# Altium PCB PCB1.PcbDoc
Units mm, origin at the board's own origin, x right, y up, seen from the top; angles counter-clockwise.
Board outline 100 x 100.5 mm, 2 copper layers (Top Layer, Bottom Layer), stack 1.58 mm thick; 55 components, 33 nets, 141 pads, 448 vias.
Unrouted connection lines stored in the file: 1.
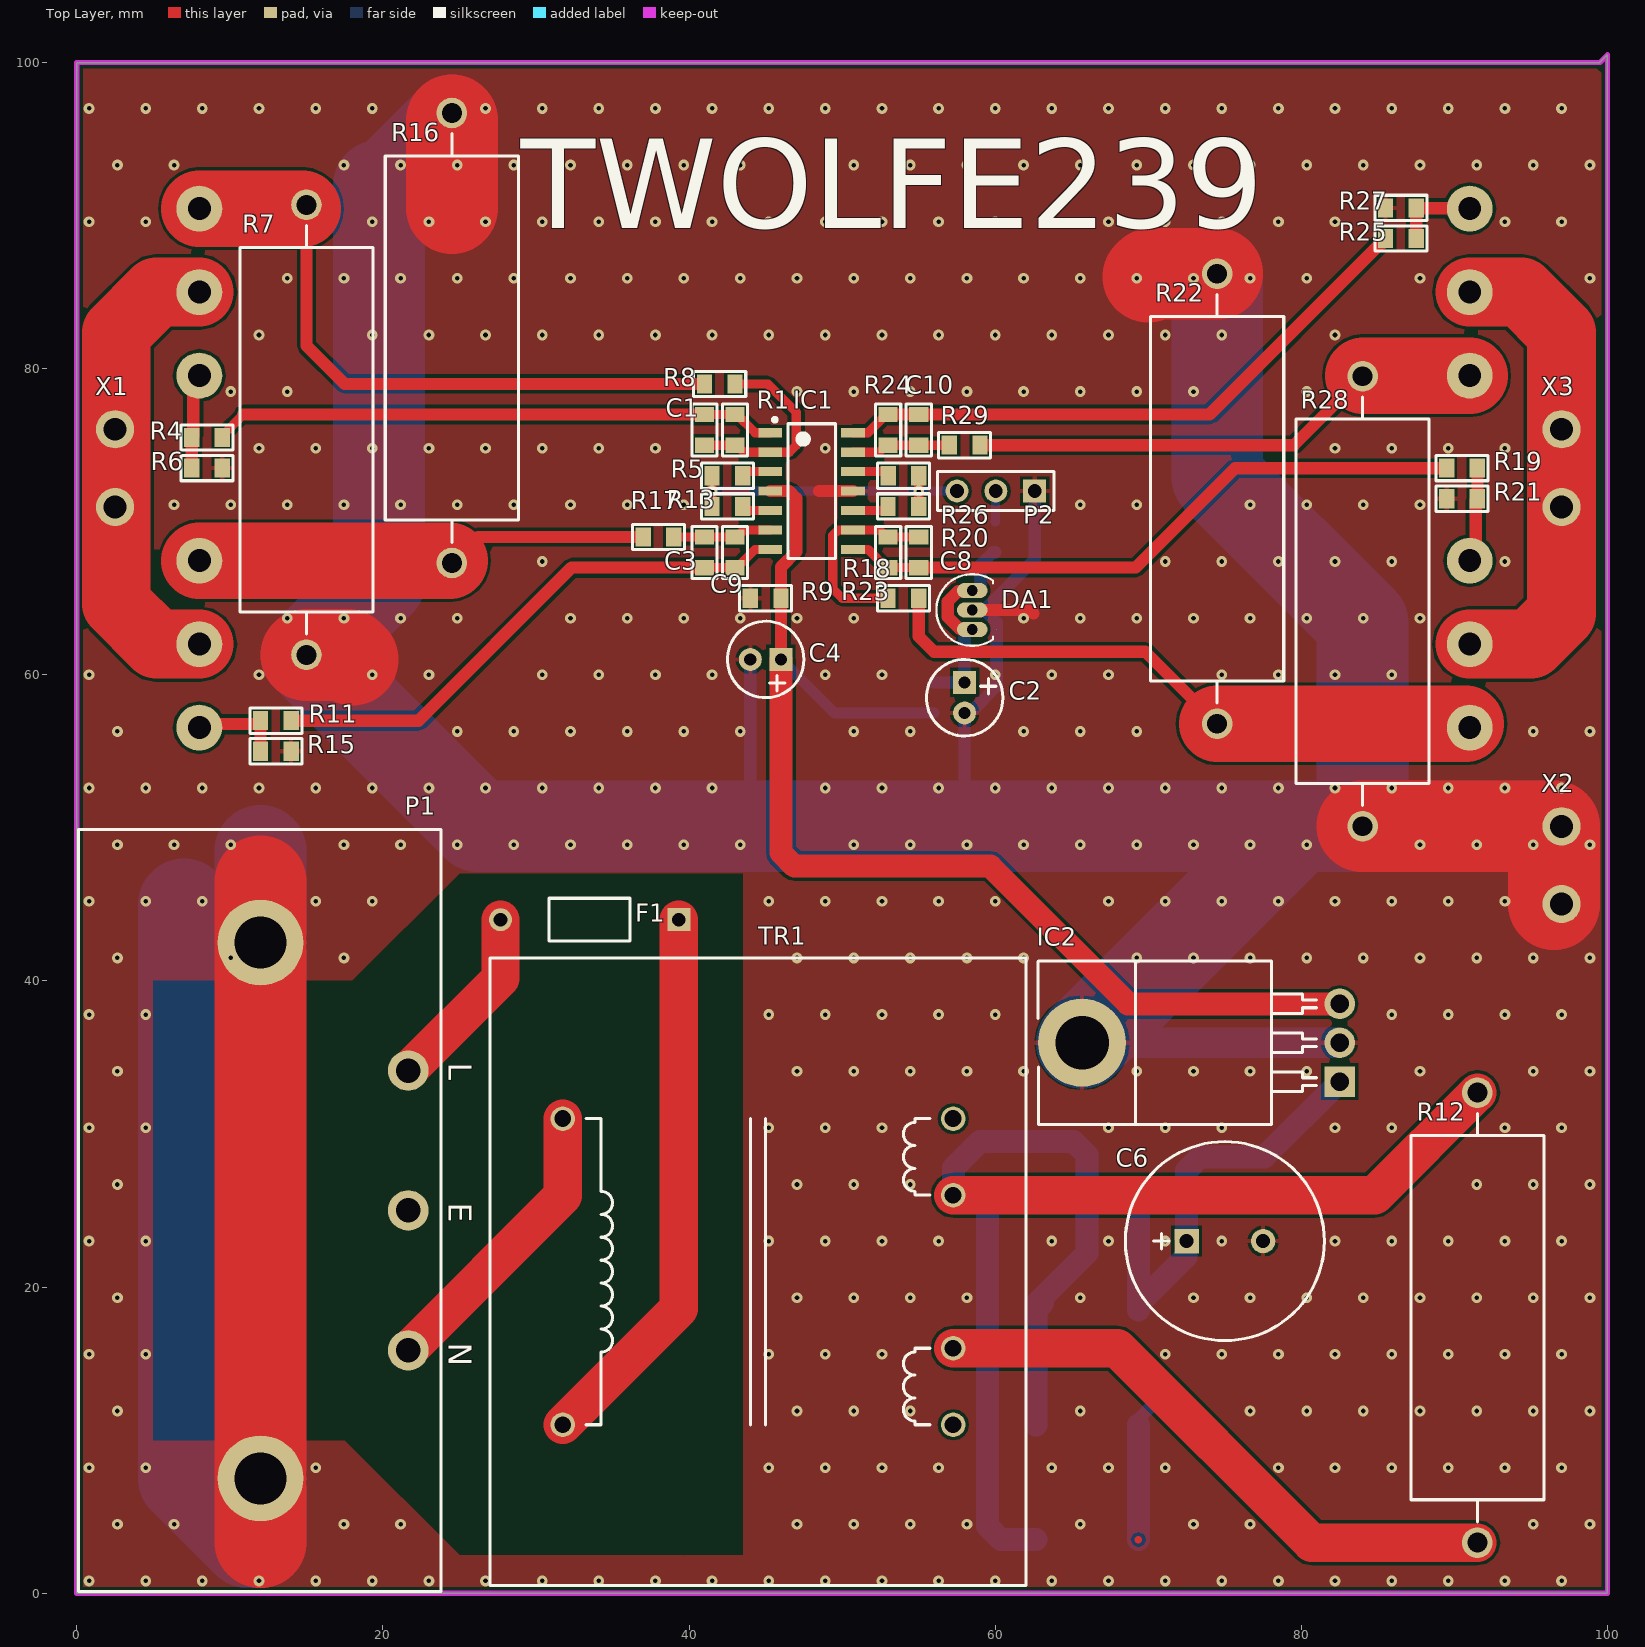
[diagram p0: Top Layer view]
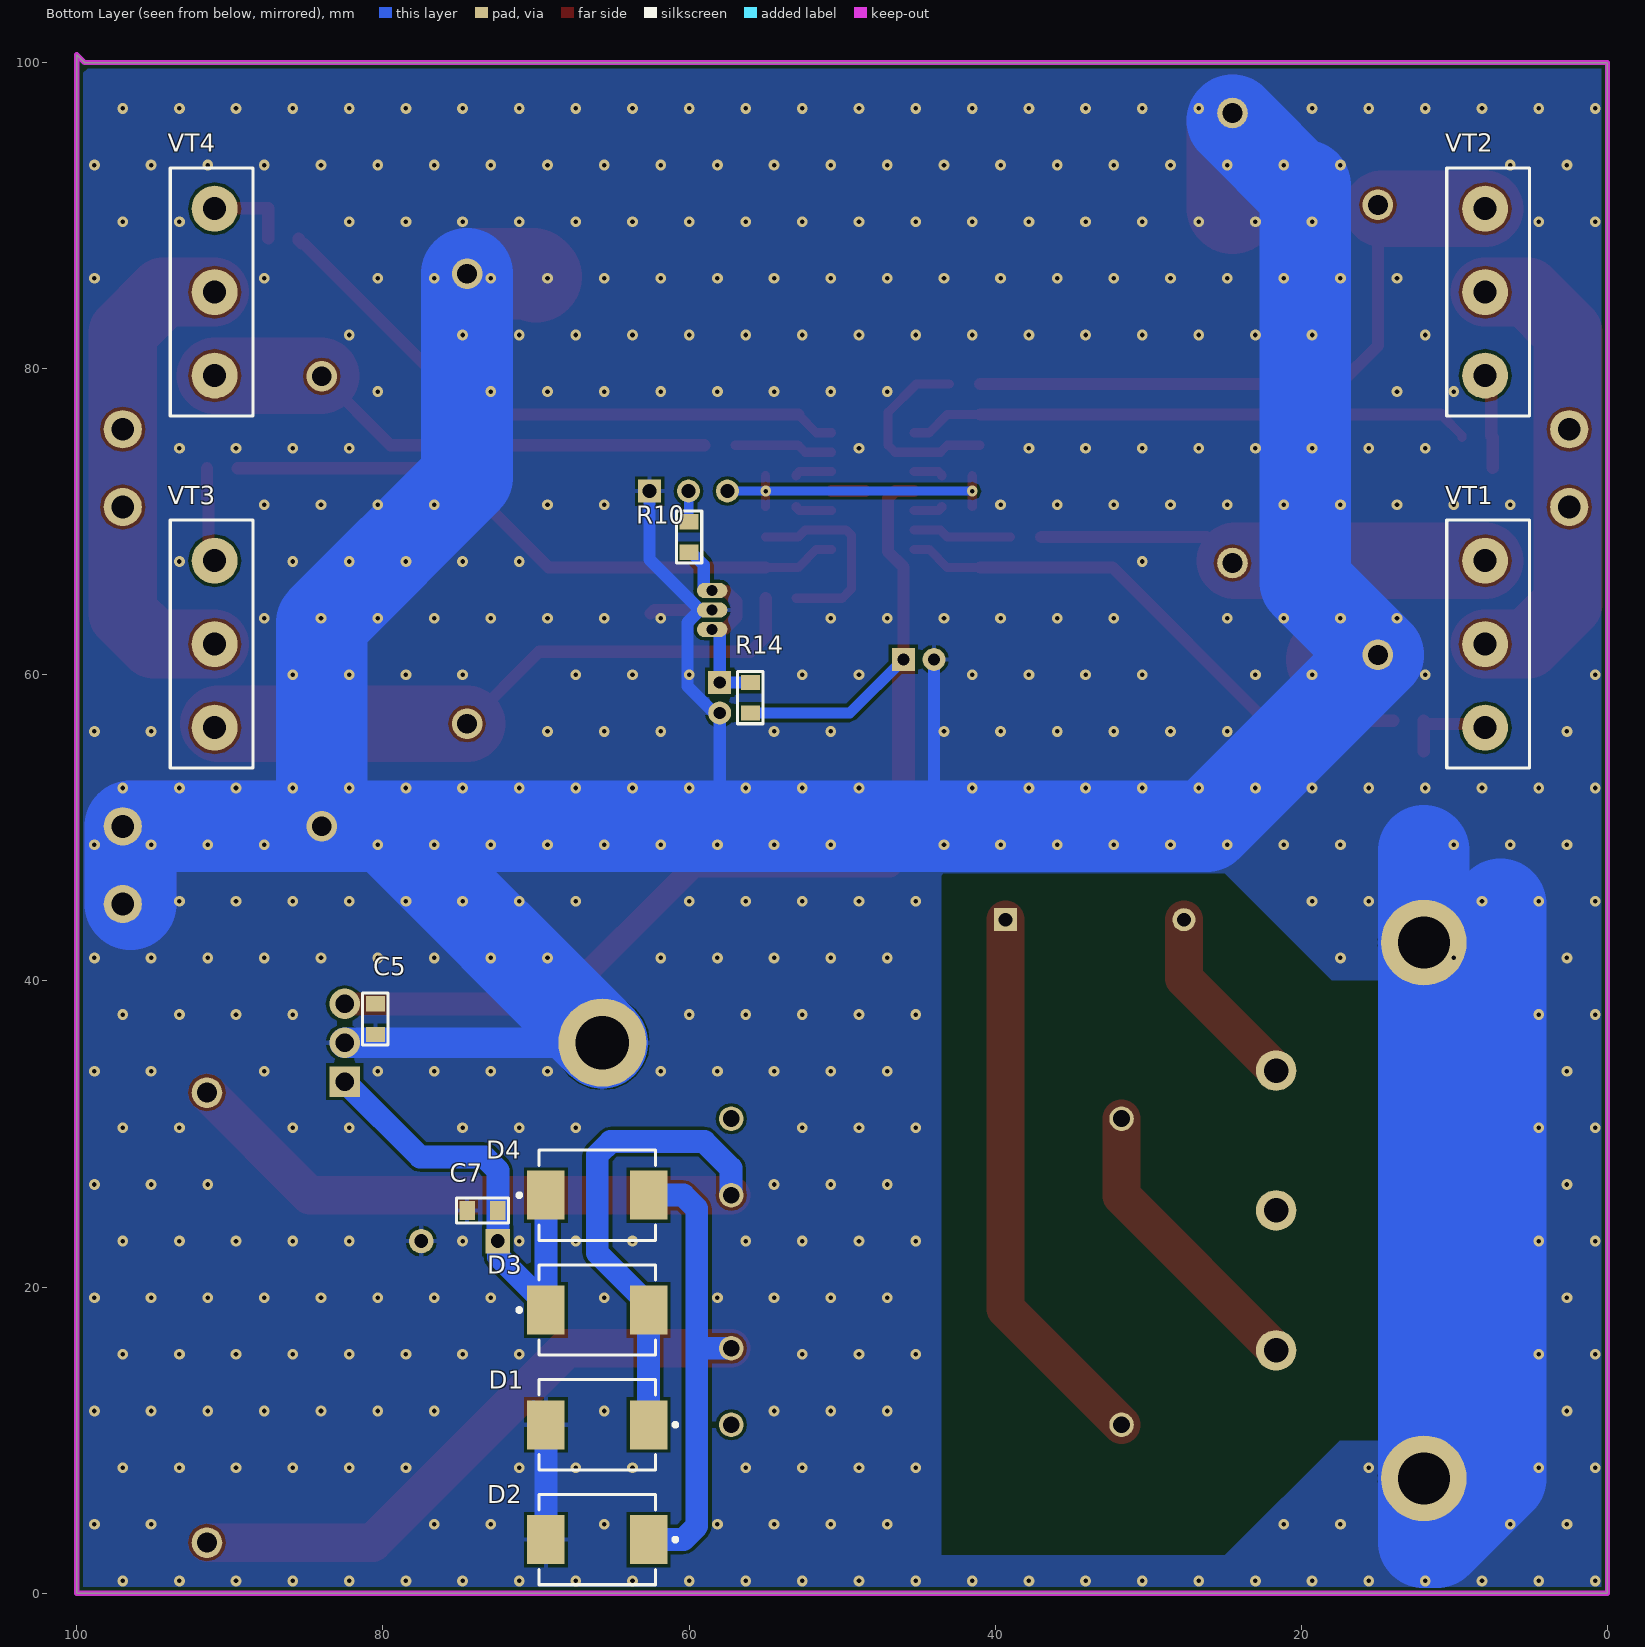
[diagram p1: Bottom Layer view, seen from below]
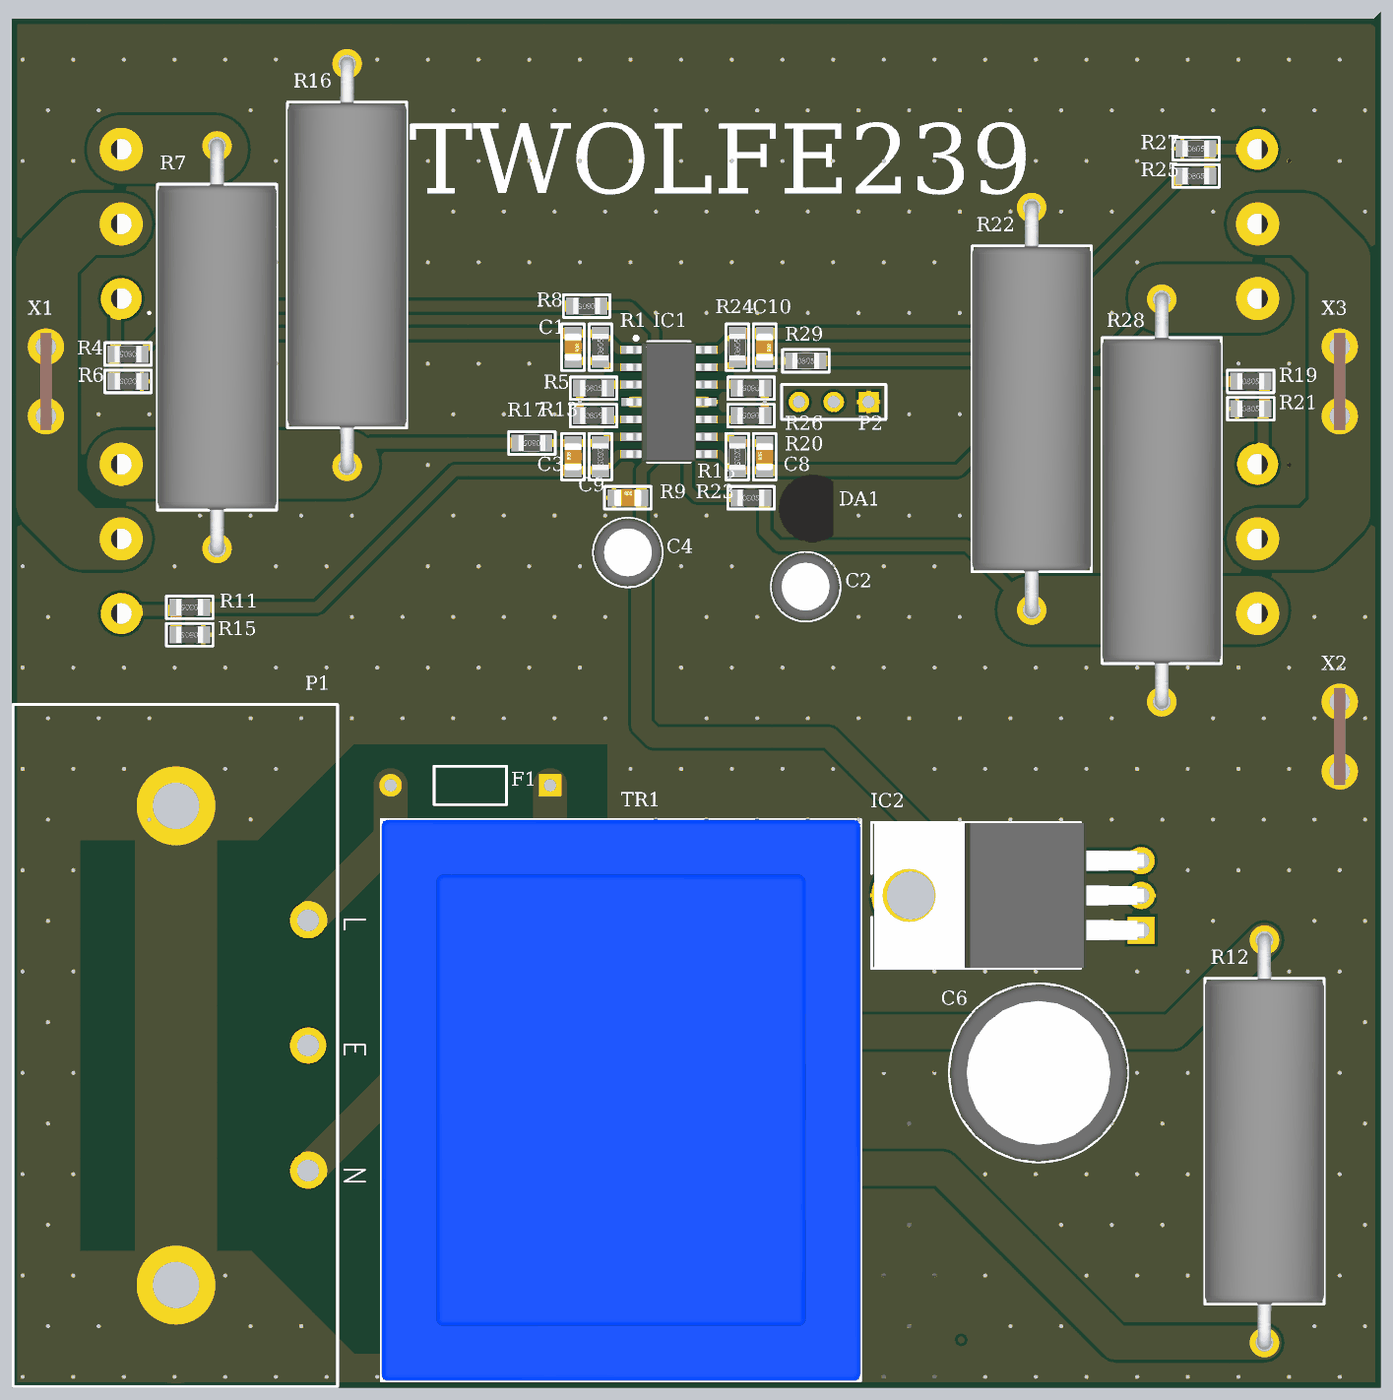
[diagram p2: 3D render of the assembled board from above, using the file's embedded part models]
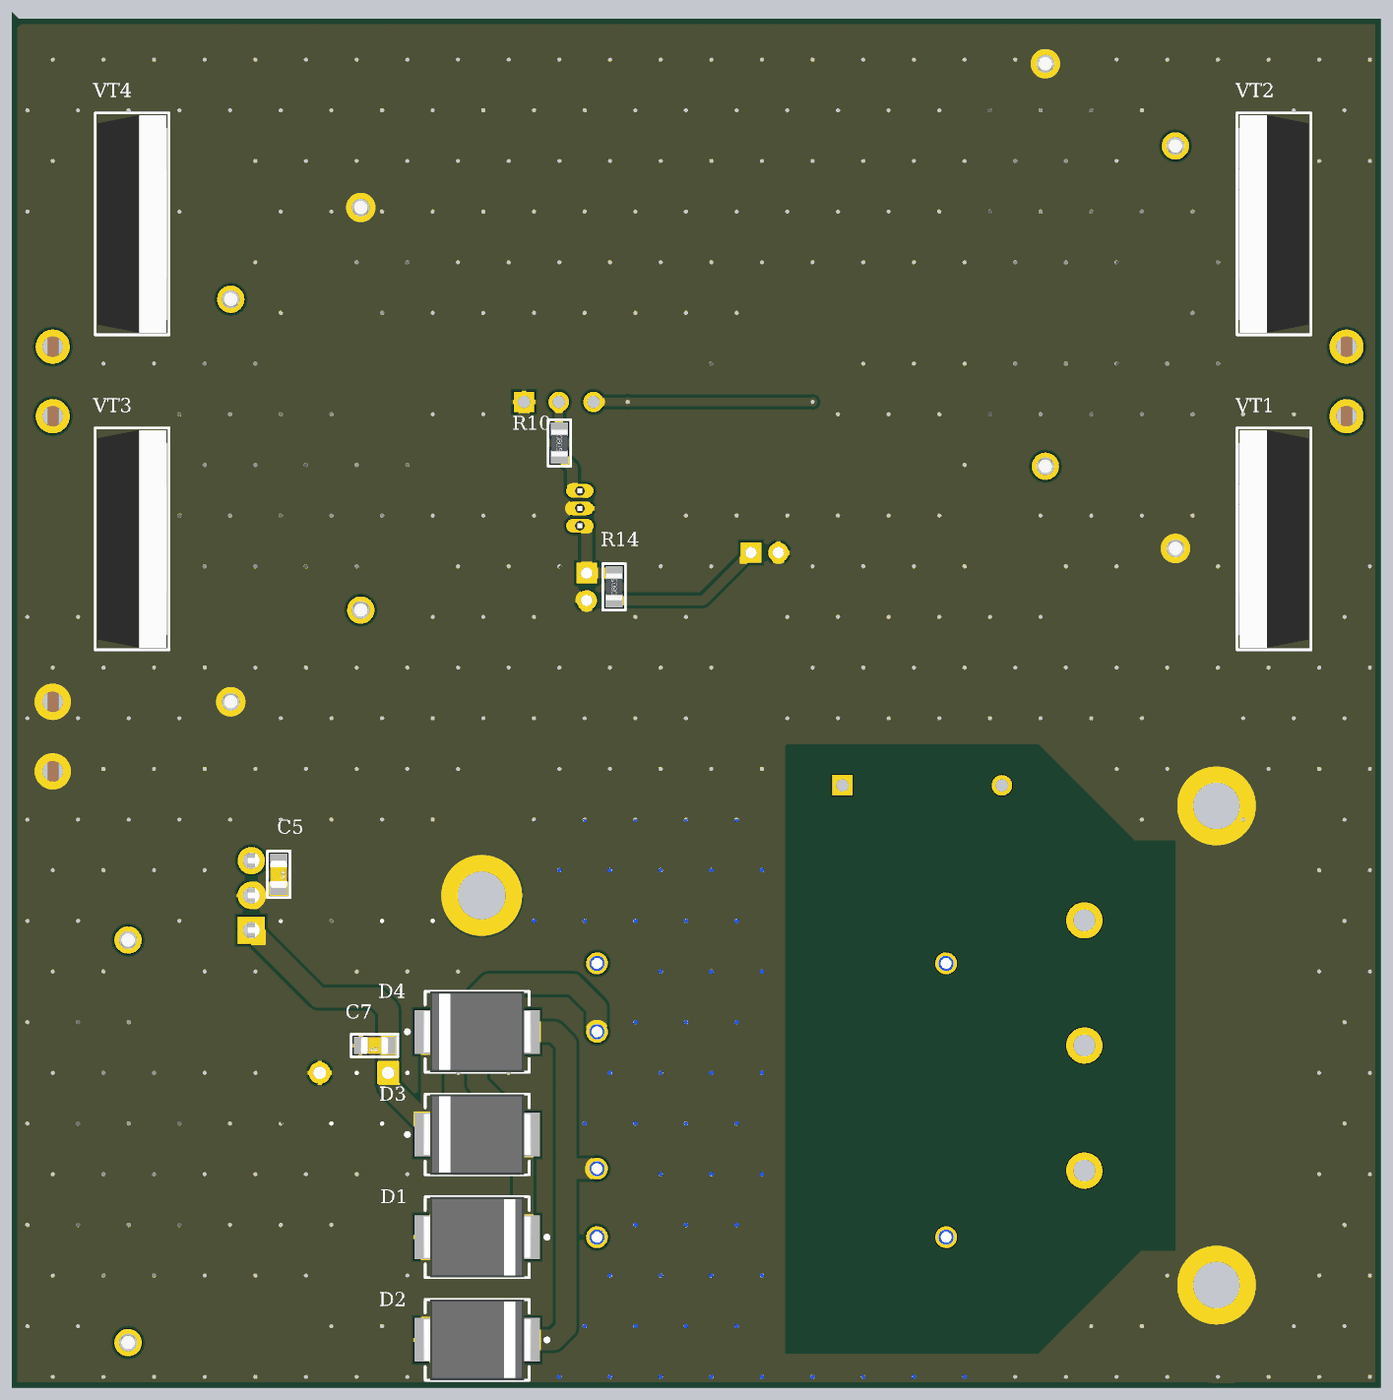
[diagram p3: 3D render of the assembled board from below, using the file's embedded part models]

## Layer stack, top to bottom
Top Solder: solder mask 0.0102, Solder Resist, Dk 3.5
Top Layer: signal copper 0.0356
Dielectric 1: dielectric 1.509, FR-4, Dk 4.8
Bottom Layer: signal copper 0.0356
Bottom Solder: solder mask 0.0102, Solder Resist, Dk 3.5

## Board outline
0,0 0,100 99.5,100 100,100.5 100,0

## Design rules (kind name [scope] priority, off if disabled: settings)
BoardOutlineClearance [All] p1: gap=0.3 ignorepadtopadclearanceinfootprint=FALSE
Clearance Clearance_MultiLayerPad [OnLayer('Multi-Layer') and IsPad] p1: gap=0.2 ignorepadtopadclearanceinfootprint=FALSE except(0: Arc-Hole Track-Hole SMDPad-Hole THPad-Hole Via-Hole Fill-Hole Poly-Hole Region-Hole Text-Hole)
Clearance Clearance_Polygon [InPolygon] p2: gap=0.15 ignorepadtopadclearanceinfootprint=FALSE except(0: Arc-Hole Track-Hole SMDPad-Hole THPad-Hole Via-Hole Fill-Hole Poly-Hole Region-Hole Text-Hole; 0.2: Arc-Poly Arc-Region Track-Poly Track-Region SMDPad-Poly SMDPad-Region THPad-Poly THPad-Region Via-Poly Via-Region Fill-Poly Fill-Region Poly-Poly Poly-Region)
Clearance [All] p3: gap=0.15 ignorepadtopadclearanceinfootprint=FALSE except(0: Arc-Hole Track-Hole SMDPad-Hole THPad-Hole Via-Hole Fill-Hole Poly-Hole Region-Hole Text-Hole)
ComponentClearance [All] p1: gap=0.5 collisioncheckmode=3 verticalgap=0.5 showdistances=FALSE
DiffPairsRouting [All] p1: maxlimit=0.4 minlimit=0.15 mostfreqgap=0.3 toplayer_minwidth=0.15 toplayer_maxwidth=0.3 toplayer_prefwidth=0.15 bottomlayer_minwidth=0.15 bottomlayer_maxwidth=0.3 bottomlayer_prefwidth=0.15 maxuncoupledlength=12.7
Height [All] p1: minheight=0 maxheight=50 prefheight=12.7
HoleSize [All] p1: absolutevalues=TRUE maxlimit=10 minlimit=0.3 maxpercent=80.000 minpercent=20.000
HoleToHoleClearance [All] p1: gap=0.3 allowstackedmicrovias=TRUE
MinimumSolderMaskSliver [All] p1: minsoldermaskwidth=0.2
PlaneClearance [All] p1: clearance=0.5
PlaneConnect [All] p1: planeconnectstyle=Relief reliefexpansion=0.5 reliefentries=4 reliefconductorwidth=0.3 reliefairgap=0.2
PolygonConnect PolygonConnect_PadGND [InNet('GND') and IsPad] p1: connectstyle=Relief reliefconductorwidth=0.3 reliefentries=4 polygonreliefangle="90 Angle" airgapwidth=0.2
PolygonConnect PolygonConnect_Via [IsVia] p2: connectstyle=Direct reliefconductorwidth=0.254 reliefentries=4 polygonreliefangle="90 Angle" airgapwidth=0.254
PolygonConnect [All] p3: connectstyle=Relief reliefconductorwidth=0.3 reliefentries=4 polygonreliefangle="90 Angle" airgapwidth=0.2
RoutingVias [All] p1: holewidth=0.3 width=0.7 viastyle="Through Hole" minholewidth=0.3 minwidth=0.6 maxholewidth=0.5 maxwidth=1.2
SilkToSolderMaskClearance [IsPad] p1: minsilkscreentomaskgap=0.2 clearancetoexposedcopper=TRUE
SolderMaskExpansion [All] p1: expansion=0.075 istentingtop=FALSE
Width [All] p1: maxlimit=10 minlimit=0.15 preferedwidth=0.15
21 further rules are at their usual default settings.

## Components (designator, comment, footprint, x,y, rotation, side; value= is the part's Value field where it differs from the comment)
C1 "Ceramic capacitor, 1nF, X7R, ±10%, 16V, 805, -55...+125°C" "CAP: 0805" 41,76 r270 top value=1nF
C2 "10uF" CAPPR200-500X1100 58,58.5 r270 top
C3 "Ceramic capacitor, 1nF, X7R, ±10%, 16V, 805, -55...+125°C" "CAP: 0805" 41,68 r90 top value=1nF
C4 "10uF" CAPPR200-500X1100 45,61 r180 top
C5 "Ceramic capacitor, 0.1uF, X7R, ±10%, 16V, 805, -55...+125°C" "CAP: 0805" 80.5,37.5 r270 bottom value=0.1uF
C6 "1000uF" CAPPR500-1300X2700 75,23 r0 top
C7 "Ceramic capacitor, 0.1uF, X7R, ±10%, 16V, 805, -55...+125°C" "CAP: 0805" 73.5,25 r0 bottom value=0.1uF
C8 "Ceramic capacitor, 1nF, X7R, ±10%, 16V, 805, -55...+125°C" "CAP: 0805" 55,68 r90 top value=1nF
C9 "Ceramic capacitor, 0.1uF, X7R, ±10%, 16V, 805, -55...+125°C" "CAP: 0805" 45,65 r0 top value=0.1uF
C10 "Ceramic capacitor, 1nF, X7R, ±10%, 16V, 805, -55...+125°C" "CAP: 0805" 55,76 r270 top value=1nF
D1 "SS34" DIOM7659X265N 66,11 r0 bottom
D2 "SS34" DIOM7659X265N 66,3.5 r0 bottom
D3 "SS34" DIOM7659X265N 66,18.5 r180 bottom
D4 "SS34" DIOM7659X265N 66,26 r180 bottom
DA1 "TL431" TO-92 58.5,64.23 r0 top
F1 "" PIN-W2/E2.8 33.5,44 r180 top
IC1 "LM324M" SOIC127P600X175-14N 48,72 r0 top
IC2 "LM7812CT" TO-220-H 82.5,35.96 r90 top
P1 "Plug AC Male" IEC9.14-2H3 3.3,25 r180 top
P2 "Header 3" HDR1X3 62.58,72 r180 top
R1 "Resistor film, 220K, ±5%, 805, 0.125W, -55...+125°C" "RES: 0805" 43,76 r90 top value=220K
R4 "Resistor film, 1K, ±5%, 805, 0.125W, -55...+125°C" "RES: 0805" 8.5,75.5 r180 top value=1K
R5 "Resistor film, 1K, ±5%, 805, 0.125W, -55...+125°C" "RES: 0805" 42.5,73 r0 top value=1K
R6 "Resistor film, 4K7, ±5%, 805, 0.125W, -55...+125°C" "RES: 0805" 8.501,73.5 r180 top value=4K7
R7 "0R22" RES_OHMITE_45 15,76 r90 top
R8 "Resistor film, 1K, ±5%, 805, 0.125W, -55...+125°C" "RES: 0805" 42,79 r180 top value=1K
R9 "Resistor film, 220K, ±5%, 805, 0.125W, -55...+125°C" "RES: 0805" 43,68 r270 top value=220K
R10 "Resistor film, 22K, ±5%, 805, 0.125W, -55...+125°C" "RES: 0805" 60,69 r270 bottom value=22K
R11 "Resistor film, 1K, ±5%, 805, 0.125W, -55...+125°C" "RES: 0805" 13,57 r180 top value=1K
R12 "100R" RES_OHMITE_45 91.5,18 r90 top
R13 "Resistor film, 1K, ±5%, 805, 0.125W, -55...+125°C" "RES: 0805" 42.5,71 r0 top value=1K
R14 "Resistor film, 10K, ±5%, 805, 0.125W, -55...+125°C" "RES: 0805" 56,58.5 r90 bottom value=10K
R15 "Resistor film, 4K7, ±5%, 805, 0.125W, -55...+125°C" "RES: 0805" 13,55 r180 top value=4K7
R16 "0R22" RES_OHMITE_45 24.5,82 r270 top
R17 "Resistor film, 1K, ±5%, 805, 0.125W, -55...+125°C" "RES: 0805" 38,69 r180 top value=1K
R18 "Resistor film, 220K, ±5%, 805, 0.125W, -55...+125°C" "RES: 0805" 53,68 r270 top value=220K
R19 "Resistor film, 1K, ±5%, 805, 0.125W, -55...+125°C" "RES: 0805" 90.499,73.5 r0 top value=1K
R20 "Resistor film, 1K, ±5%, 805, 0.125W, -55...+125°C" "RES: 0805" 54,71 r180 top value=1K
R21 "Resistor film, 4K7, ±5%, 805, 0.125W, -55...+125°C" "RES: 0805" 90.5,71.5 r0 top value=4K7
R22 "0R22" RES_OHMITE_45 74.5,71.5 r270 top
R23 "Resistor film, 1K, ±5%, 805, 0.125W, -55...+125°C" "RES: 0805" 54,65 r0 top value=1K
R24 "Resistor film, 220K, ±5%, 805, 0.125W, -55...+125°C" "RES: 0805" 53,76 r90 top value=220K
R25 "Resistor film, 1K, ±5%, 805, 0.125W, -55...+125°C" "RES: 0805" 86.5,88.5 r0 top value=1K
R26 "Resistor film, 1K, ±5%, 805, 0.125W, -55...+125°C" "RES: 0805" 54,72.999 r180 top value=1K
R27 "Resistor film, 4K7, ±5%, 805, 0.125W, -55...+125°C" "RES: 0805" 86.5,90.5 r0 top value=4K7
R28 "0R22" RES_OHMITE_45 84,64.8 r90 top
R29 "Resistor film, 1K, ±5%, 805, 0.125W, -55...+125°C" "RES: 0805" 58,75 r0 top value=1K
TR1 "230V to 1x 15V" XFMR_CLAIRTRONIC_14102 44.5,21 r0 top
VT1 "MOSFET N-channel transistor, 80V, 7A, 9.1nC, 2.5W, 34mOhm, 756pF, 8-TDSON, -55...+150°C" TO247 8,62 r90 bottom
VT2 "MOSFET N-channel transistor, 80V, 7A, 9.1nC, 2.5W, 34mOhm, 756pF, 8-TDSON, -55...+150°C" TO247 8,85 r90 bottom
VT3 "MOSFET N-channel transistor, 80V, 7A, 9.1nC, 2.5W, 34mOhm, 756pF, 8-TDSON, -55...+150°C" TO247 91,62 r270 bottom
VT4 "MOSFET N-channel transistor, 80V, 7A, 9.1nC, 2.5W, 34mOhm, 756pF, 8-TDSON, -55...+150°C" TO247 91,85 r270 bottom
X1 "62650-1" 62650-1 2.5,73.5 r90 top
X2 "62650-1" 62650-1 97,47.56 r90 top
X3 "62650-1" 62650-1 97,73.5 r90 top

## Footprints (in the part's own frame and the unit in brackets; to place one, negate y for a bottom-side part, rotate by r counter-clockwise, add the part's x,y. Pads: shape width x height; smd on the part's side, far side on the other; paste and mask are expansions set on the pad)
62650-1 [mm]
  round 2.5 hole 1.5: 1(-2.54,0) 1(2.54,0)
  body extent -3.55,-0.42 3.56,0.42, height 9.19
"CAP: 0805" [mm]
  rect 1x1.25 smd: 1(-1,0) 2(1,0)
  silkscreen extent -1.7,-0.82 1.7,0.82, body extent -1,-0.62 1,0.63, height 0.78
CAPPR200-500X1100 [mm] "Capacitor, Radial, Pin spacing 2.0mm - Body Diameter 5.0mm X Body Height 11mm"
  rect 1.5x1.5 hole 0.8: 1(-1,0)
  round 1.5 hole 0.8: 2(1,0)
  silkscreen extent -2.5,-2.5 2.5,2.5, body extent -2.51,-2.51 2.49,2.49, height 10.9
CAPPR500-1300X2700 [mm] "Capacitor, Radial, Pin spacing 5.0mm - Body Diameter 13.0mm X Body Height 27.0mm"
  rect 1.6x1.6 hole 0.9: 1(-2.5,0)
  round 1.6 hole 0.9: 2(2.5,0)
  silkscreen extent -6.5,-6.5 6.5,6.5, body extent -6.5,-6.48 6.5,6.48, height 27
DIOM7659X265N [mm] "DO-214-AB/SMC Molded Diode, Body 7.95x5.9mm, IPC Medium Density"
  rect 2.45x3.2 smd: 1(-3.35,0) 2(3.35,0)
  silkscreen extent -5.22,-2.95 3.8,2.95, body extent -3.97,-2.95 3.98,2.95, height 2.65
HDR1X3 [mm] "Connector; Header; 3 Position"
  rect 1.5x1.5 hole 0.9: 1(0,0)
  round 1.5 hole 0.9: 2(2.54,0) 3(5.08,0)
  silkscreen extent -1.27,-1.27 6.35,1.27
IEC9.14-2H3 [mm] "Mains Power Inlet, IEC60 320-1 C14, PC Flange Rear Mount"
  round 2.65 hole 1.6: 1(-18.35,-9.14) 2(-18.35,9.14) 3(-18.35,0)
  round 5.6 hole 3.4: MH1(-8.7,17.5) MH2(-8.7,-17.5)
  silkscreen extent -20.5,-24.9 3.2,24.9
PIN-W2/E2.8 [mm] "Thru-Hole; 2 Leads"
  rect 1.5x1.5 hole 0.9: 1(-5.825,0)
  round 1.5 hole 0.9: 2(5.825,0)
  silkscreen extent -2.65,-1.4 2.65,1.4
"RES: 0805" [mm]
  rect 1x1.25 smd: 1(-1,0) 2(1,0)
  silkscreen extent -1.7,-0.82 1.7,0.82, body extent -1,-0.6 1,0.6, height 0.44
RES_OHMITE_45 [mm] "Resistor, Axial, Pad Spacing 29.4mm - Body Lengh 23.8mm X Body Diameter 8.7mm"
  round 2 hole 1.3: 1(-14.7,0) 2(14.7,0)
  silkscreen extent -13.35,-4.35 13.35,4.35, body extent -15.2,-4.35 15.2,4.35, height 8.7
SOIC127P600X175-14N [mm] "SOIC 14, Pitch 1.27mm - Body 4x8.75mm, IPC Medium Density"
  rect 1.55x0.6 smd: 1(-2.7,3.81) 2(-2.7,2.54) 3(-2.7,1.27) 4(-2.7,0) 5(-2.7,-1.27) 6(-2.7,-2.54) 7(-2.7,-3.81) 8(2.7,-3.81) 9(2.7,-2.54) 10(2.7,-1.27) 11(2.7,0) 12(2.7,1.27) 13(2.7,2.54) 14(2.7,3.81)
  silkscreen extent -2.52,-4.4 1.55,4.78, body extent -3.1,-4.37 3.1,4.38, height 1.75
TO247 [mm] "3-Lead Plastic TO-247"
  round 3 hole 1.5: 1(-5.45,0) 2(0,0) 3(5.45,0)
  round 0.5 on Mech2: ""(-7.4,-2.3)
  silkscreen extent -8.1,-2.9 8.1,2.5, body extent -7.95,-2.75 7.95,2.35, height 26.95
TO-92 [mm] "TO, Flat Index; 3 In-Line, Axial Leads; Body Dia. 4.6mm; Leads 0.41 x 0.39 mm (max)"
  oval 2x1 hole 0.7: 1(0,-1.27) 2(0,0) 3(0,1.27)
  silkscreen extent -2.34,-2.34 1.35,2.34, body extent -2.5,-2.5 1.5,2.5, height 7
TO-220-H [mm] "TO-220 3-Terminal + Tab - Horizontal Mount"
  rect 2x2 hole 1.2: 1(-2.54,0)
  round 2 hole 1.2: 2(0,0) 3(2.54,0)
  round 5.75 hole 3.5: 4(0,16.828)
  silkscreen extent -5.33,1.5 5.33,19.7, body extent -5.27,-0.28 5.27,19.49, height 4.7
XFMR_CLAIRTRONIC_14102 [mm] "CLAIRTRONIC 14102 Encapsulated Transformer 3.5VA - Body 41X35mm"
  round 1.6 hole 1.1: 1(-12.75,10) 2(-12.75,-10) 3(12.75,10) 4(12.75,5) 5(12.75,-5) 6(12.75,-10)
  silkscreen extent -17.5,-20.5 17.5,20.5, body extent -17.5,-20.5 17.5,20.5, height 28

## Part data
C1 C3 C5 C7 C8 C9 C10: library part Ceramic_0805, Manufacturer=Yageo, Package=0805, PartNumber=CC0805KRX7R7BB104, Temperature=-55...+125°C, Tolerance=±10%, TypeCapacitor="Ceramic capacitor", TypeDielectric=X7R, Voltage=16V, HelpURL=https://www.digikey.com/product-detail/en/yageo/CC0805KRX7R7BB104/311-1142-1-ND/303052
  C1 C3 C8 C10: ValueManufacturerPartNumber="Ceramic capacitor, 1nF, X7R, ±10%, 16V, 805, -55...+125°C"
  C5 C7 C9: ValueManufacturerPartNumber="Ceramic capacitor, 0.1uF, X7R, ±10%, 16V, 805, -55...+125°C"
C2 C4: library part CAER_10UF_63V_20%_PANASONIC_ECA1JM100, "Polarised capacitor", Case="LS2 D5 x H11", Manufacturer=PANASONIC, Manufacturer Part Number=ECA1JM100, Tolerance=±20%, Voltage=63V, Author="CERN DEM JLC", Component Type=Standard, ComponentHeight=11mm, CreateDate=04.03.2009, HelpURL=\\cern.ch\dfs\Applications\Altium\Datasheets\CAER_PANASONIC_M.pdf, LatestRevisionDate=04.03.2009, Mounted=Yes, Part Description="Aluminum Electrolytic Capacitor (Series: M Type: A)", Part Number=CAER_10UF_63V_20%_PANASONIC_ECA1JM100, Pin Count=2, Sense=No, SMD=No, Socket=No, Status=None
C6: library part CAER_1000UF_35V_20%_VISHAY_MAL215050102E3, "Polarised capacitor", Case="LS5 D12.5 x H25", Manufacturer="VISHAY BCCOMPONENTS", Manufacturer Part Number=MAL215050102E3, Tolerance=±20%, Voltage=35V, Author="CERN DEM JLC", Component Type=Standard, ComponentHeight=27mm, CreateDate=12.03.2015, HelpURL="\\cern.ch\dfs\Applications\Altium\Datasheets\CAER_VISHAY_150 RMI.pdf", LatestRevisionDate=12.03.2015, Mounted=Yes, Part Description="Radial Miniature, Low Impedance (Z= 0R029) Aluminum Electrolytic Capacitor, (150 RMI Series)", Part Number=CAER_1000UF_35V_20%_VISHAY_MAL215050102E3, Pin Count=2, Sense=No, SMD=No, Socket=No, Status=None
D1 D2 D3 D4: "Schottky Diode", Case=DO-214AC, Manufacturer="FAIRCHILD SEMICONDUCTOR", Power=3A, Voltage=40V, Author="CERN DEM JLC", Bonding=No, Component Type=Standard, ComponentHeight=2.65mm, CreateDate=23.08.2010, Device=SS34, HelpURL=\\cern.ch\dfs\Applications\Altium\Datasheets\SS34.pdf, LatestRevisionDate=23.08.2010, Manufacturer Part Number=SS34, Mounted=Yes, PackageDescription="DO-214-AB/SMC Molded Diode, Body 7.95x5.9mm, IPC Medium Density", Part Description="Surface Mount Schottky Barrier Rectifier", Part Number=SS34, Pin Count=2, PressFit=No, Sense=No, SMD=Yes, Socket=No
DA1: "*", Package=TO-92, BOM=TL431, Category=ICs, ComponentLink1Description=Datasheet, ComponentLink1URL=http://www.ti.com/lit/ds/symlink/tl431.pdf, ComponentType=Микросхема, Footprint Patch=ic.PcbLib, Part Number=TL431
F1: library part "Fuse 2", "Fuse", LatestRevisionDate=17-Jul-2002, LatestRevisionNote="Re-released for DXP Platform.", PackageDescription="Thru-Hole; 2 Leads", PackageReference=PIN-W2/E2.8, Published=8-Jun-2000, Publisher="Altium Limited"
IC1: "Quad Operational Amplifier", Case=SOIC14, Manufacturer="FAIRCHILD SEMICONDUCTOR", Author="CERN DEM JLC", Bonding=No, Component Type=Standard, ComponentHeight=1.80mm, CreateDate=20.08.2008, Device=LM324M, HelpURL=\\cern.ch\dfs\Applications\Altium\Datasheets\LM324M.pdf, LatestRevisionDate=20.08.2008, Manufacturer Part Number=LM324M, Mounted=Yes, PackageDescription="SOIC 14, Pitch 1.27mm - Body 4x8.75mm, IPC Medium Density", Part Description="Quad Operational Amplifier", Part Number=LM324M, Pin Count=14, PressFit=No, Sense=No, SMD=Yes, Socket=No, Status="Not recommended"
IC2: library part LM7812CT_h, "3-Terminal Regulator 1=IN 2=GND 3=OUT 4=GND", Case=TO-220, Manufacturer="FAIRCHILD SEMICONDUCTOR", Author="CERN DEM JLC", Bonding=No, Component Type=Standard, ComponentHeight=4.7mm, CreateDate=29.10.2008, Device=LM7812CT, HelpURL=\\cern.ch\dfs\Applications\Altium\Datasheets\LM7812CT.pdf, LatestRevisionDate=29.10.2008, Manufacturer Part Number=LM7812CT, Mounted=Yes, PackageDescription="TO-220 3-Terminal + Tab - Horizontal Mount", Part Description="3-Terminal 12V 1A Positive Voltage Regulator", Part Number=LM7812CT_h, Pin Count=4, PressFit=No, Sense=No, SMD=No, Socket=No
P1: "IEC Mains Power Inlet, EN60 320-1 C14 Class I Cold Condition, PC Flange Rear Mount, Chassis Plug", MaximumRating="10A, 250V a.c. (UL & CSA 15A, 250V a.c.)", PackageDocument="ver.80, 15-Sep-2003", ComponentLink1Description="Manufacturer Link", ComponentLink1URL=http://www.bulgin.co.uk/, DatasheetDocument="ver.80, 15-Sep-2003", DrillSize="Corresponds to nominal value.", LatestRevisionDate=15-Jul-2004, LatestRevisionNote="Component Replaced.", MountingFixtures="Not drawn on schematic symbol.", Note="IEC Color Scheme employed for L, N and E.", PackageReference=PX0580/PC, PCB_Layout="Complies with manufacturer's recommendation.", Published=15-Jul-2004, Publisher="Altium Limited", Terminations="P.C. Spills"
P2: "Header, 3-Pin", LatestRevisionDate=17-Jul-2002, LatestRevisionNote="Re-released for DXP Platform.", Publisher="Altium Limited"
R1 R4 R5 R6 R8 R9 R10 R11 R13 R14 R15 R17 R18 R19 R20 R21 R23 R24 R25 R26 R27 R29: library part Resistor_0805, Manufacturer=Yageo, Package=0805, PartNumber=RC0805JR-07100RL, Power=0.125W, Temperature=-55...+125°C, Tolerance=±5%, TypeResistor="Resistor film", HelpURL=https://www.digikey.com/product-detail/en/yageo/RC0805JR-07100RL/311-100ARCT-ND/731185
  R1 R9 R18 R24: ValueManufacturerPartNumber="Resistor film, 220K, ±5%, 805, 0.125W, -55...+125°C"
  R4 R5 R8 R11 R13 R17 R19 R20 R23 R25 R26 R29: ValueManufacturerPartNumber="Resistor film, 1K, ±5%, 805, 0.125W, -55...+125°C"
  R6 R15 R21 R27: ValueManufacturerPartNumber="Resistor film, 4K7, ±5%, 805, 0.125W, -55...+125°C"
  R10: ValueManufacturerPartNumber="Resistor film, 22K, ±5%, 805, 0.125W, -55...+125°C"
  R14: ValueManufacturerPartNumber="Resistor film, 10K, ±5%, 805, 0.125W, -55...+125°C"
R7 R12 R16 R22 R28: library part RWW_0R5_1%_5W_90PPM_OHMITE_45, "Resistor", Case="LS29.4 L23.8 x D8.7", Power=5W, Author="CERN DEM MR", Component Type=Standard, ComponentHeight=8.7mm, CreateDate=27.04.2016, HelpURL=\\cern.ch\dfs\Applications\Altium\Datasheets\RWW_OHMITE_40.pdf, LatestRevisionDate=27.04.2016, Mounted=Yes, Pin Count=2, PressFit=No, Sense=No, SMD=No, Socket=No, Status=None
TR1: library part XFMR_CLAIRTRONIC_14102, "Transformer 1xPrim 1xSec Type1", Manufacturer="CLAIRTRONIC LTD", Manufacturer Part Number=14102, Author="CERN DEM JMW", Component Type=Standard, ComponentHeight=26mm, CreateDate=11.07.2008, LatestRevisionDate=15.07.2008, Mounted=Yes, Part Description="220V to 1x15V 4.5VA Encapsulated Transformer", Part Number=XFMR_CLAIRTRONIC_14102, Pin Count=6, Sense=No, SMD=No, Socket=No, Status=Obsolete
VT1 VT2 VT3 VT4: library part MOSFET_N_123, CurrentDS=7A, InputCapacitor=756pF, Manufacturer="Infineon Technologies", MaxPower=2.5W, Package=8-TDSON, PartNumber=24N60DM2, Temperature=-55...+150°C, VoltageDS=80V, GateCharge=9.1nC, HelpURL=https://www.digikey.com/product-detail/en/infineon-technologies/BSC340N08NS3GATMA1/BSC340N08NS3GATMA1TR-ND/2080655, RDS=34mOhm, TypeTransistor="MOSFET N-channel transistor", ValueManufacturerPartNumber="MOSFET N-channel transistor, 80V, 7A, 9.1nC, 2.5W, 34mOhm, 756pF, 8-TDSON, -55...+150°C"
X1 X2 X3: "Ножевой контакт 6,3мм на плату", Manufacturer="TE Connectivity", BOM="62650-1, TE Connectivity", Category=CONNECTOR, ComponentLink1Description=Datasheet, ComponentLink1URL=http://www.farnell.com/datasheets/1650963.pdf, ComponentType=Соединитель, Footprint Patch=connector.PcbLib, Part Number=62650-1

## Via types
v1: diameter 0.7, hole 0.3, Top Layer to Bottom Layer, tented both sides, 448 vias

## Nets (pads, with @x,y where several pads share a name; then routed paths per layer and width w, separated by ;. In a path a pad name is that pad's centre, name@x,y a point inside that pad or via, vN(x,y) a via of type N, cw(c..) or ccw(c..) an arc to the next point about the centre after c; other vN are vias at no path point)
+12V: C4.1 C5.1 C9.2 IC1.4 IC2.3 R14.1 | length 77.5
  Top Layer w0.8: IC1.4 46.531,72 47,71.531 47,68.037 46,67.037 C9.2 C4.1
  Top Layer w1.5: C4.1 46,48.379 46.879,47.5 59.682,47.5 68.682,38.5 IC2.3
  Bottom Layer w0.7: C4.1 49.5,57.5 R14.1
+21V: C6.1 C7.1 D3.1 D4.1 IC2.1 | length 30
  Bottom Layer w1.5: D3.1 D3.1@69.35,18.875 ; D4.1 D3.1@69.35,18.875 ; IC2.1 77.58,28.5 73.379,28.5 72.5,27.621 C7.1 C6.1 72.45,22.95 72.45,21.975 D3.1@69.35,18.875
GND: C2.2 C4.2 C5.2 C6.2 C7.2 C9.1 D1.2 D2.2 DA1.2 IC1.11 IC2.2 IC2.4 P1.MH1 P1.MH2 P2.1 R6.1 R7.1 R15.1 R16.1 R21.1 R22.1 R27.1 R28.1 X2.1 | length 427.8
  Top Layer w0.8: 48.5,72 IC1.11 ; C2.2@57.866,57.634 C2.2 ; DA1.2 62.27,64.23 62.5,64
  Top Layer w6: 12,3.325 P1.MH1 P1.MH2 12,46.5 ; R7.1 17.7,61.3 18,61 ; 24.5,90.5 R16.1@24.5,96.2 ; 70,86 70.2,86.2 R22.1 ; R28.1 96.5,50.1 X2.1@96.5,45.02
  Bottom Layer w0.8: 44,50.1 C4.2 ; 58,50.1 C2.2 58.134,57.634 58.482,57.634 60.1,59.251 60.1,63.416 59.324,64.192 58.538,64.192 DA1.2 58.538,64.268 59.324,64.268 62.58,67.524 P2.1 ; D1.2 69.35,11.375 D1.2@70.175,12.2
  Bottom Layer w1.5: D2.2 D1.2
  Bottom Layer w2: IC2.4 IC2.2
  Bottom Layer w6: 7,45 7,7.5 11.175,3.325 12,3.325 P1.MH1 P1.MH2 12,48.5 ; 19.75,91.95 19.75,91.45 ; R16.1@24.5,96.2 19.75,91.45 ; IC2.4 79.812,50.1 96.5,50.1 X2.1@96.5,45.02 ; R22.1 74.5,72.9 84,63.4 R28.1 58,50.1 44,50.1 26.2,50.1 R7.1 19.75,66.05 19.75,91.45
  other v1: 0.8,0.8 4.5,0.8 8.2,0.8 11.9,0.8 15.6,0.8 19.3,0.8 23,0.8 26.7,0.8 30.4,0.8 34.1,0.8 37.8,0.8 41.5,0.8 45.2,0.8 48.9,0.8 52.6,0.8 56.3,0.8 60,0.8 63.7,0.8 67.4,0.8 71.1,0.8 74.8,0.8 78.5,0.8 82.2,0.8 85.9,0.8 89.6,0.8 93.3,0.8 97,0.8 2.65,4.5 6.35,4.5 17.45,4.5 21.15,4.5 47.05,4.5 50.75,4.5 54.45,4.5 58.15,4.5 65.55,4.5 72.95,4.5 76.65,4.5 95.15,4.5 98.85,4.5 0.8,8.2 4.5,8.2 15.6,8.2 45.2,8.2 48.9,8.2 52.6,8.2 56.3,8.2 63.7,8.2 67.4,8.2 71.1,8.2 78.5,8.2 82.2,8.2 85.9,8.2 89.6,8.2 93.3,8.2 97,8.2 2.65,11.9 47.05,11.9 50.75,11.9 54.45,11.9 65.55,11.9 76.65,11.9 80.35,11.9 84.05,11.9 87.75,11.9 91.45,11.9 95.15,11.9 98.85,11.9 0.8,15.6 4.5,15.6 45.2,15.6 48.9,15.6 52.6,15.6 71.1,15.6 74.8,15.6 78.5,15.6 82.2,15.6 85.9,15.6 89.6,15.6 93.3,15.6 97,15.6 2.65,19.3 47.05,19.3 50.75,19.3 54.45,19.3 58.15,19.3 65.55,19.3 72.95,19.3 76.65,19.3 80.35,19.3 84.05,19.3 87.75,19.3 91.45,19.3 95.15,19.3 98.85,19.3 0.8,23 4.5,23 45.2,23 48.9,23 52.6,23 56.3,23 63.7,23 67.4,23 71.1,23 74.8,23 82.2,23 85.9,23 89.6,23 93.3,23 97,23 2.65,26.7 47.05,26.7 50.75,26.7 54.45,26.7 91.45,26.7 95.15,26.7 98.85,26.7 0.8,30.4 4.5,30.4 45.2,30.4 48.9,30.4 52.6,30.4 67.4,30.4 71.1,30.4 74.8,30.4 82.2,30.4 85.9,30.4 93.3,30.4 97,30.4 2.65,34.1 47.05,34.1 50.75,34.1 54.45,34.1 58.15,34.1 61.85,34.1 69.25,34.1 72.95,34.1 76.65,34.1 80.35,34.1 87.75,34.1 95.15,34.1 98.85,34.1 0.8,37.8 4.5,37.8 45.2,37.8 48.9,37.8 52.6,37.8 56.3,37.8 60,37.8 85.9,37.8 89.6,37.8 93.3,37.8 97,37.8 2.65,41.5 10.05,41.5 17.45,41.5 47.05,41.5 50.75,41.5 54.45,41.5 58.15,41.5 61.85,41.5 69.25,41.5 72.95,41.5 76.65,41.5 80.35,41.5 84.05,41.5 87.75,41.5 91.45,41.5 95.15,41.5 98.85,41.5 0.8,45.2 4.5,45.2 8.2,45.2 15.6,45.2 19.3,45.2 45.2,45.2 48.9,45.2 52.6,45.2 56.3,45.2 60,45.2 67.4,45.2 71.1,45.2 74.8,45.2 78.5,45.2 82.2,45.2 85.9,45.2 89.6,45.2 93.3,45.2 2.65,48.9 6.35,48.9 10.05,48.9 17.45,48.9 21.15,48.9 24.85,48.9 28.55,48.9 32.25,48.9 35.95,48.9 39.65,48.9 43.35,48.9 50.75,48.9 54.45,48.9 58.15,48.9 61.85,48.9 65.55,48.9 69.25,48.9 72.95,48.9 76.65,48.9 80.35,48.9 87.75,48.9 91.45,48.9 95.15,48.9 98.85,48.9 0.8,52.6 4.5,52.6 8.2,52.6 11.9,52.6 15.6,52.6 19.3,52.6 23,52.6 26.7,52.6 30.4,52.6 34.1,52.6 37.8,52.6 41.5,52.6 48.9,52.6 52.6,52.6 56.3,52.6 60,52.6 63.7,52.6 67.4,52.6 71.1,52.6 74.8,52.6 78.5,52.6 82.2,52.6 85.9,52.6 89.6,52.6 93.3,52.6 97,52.6 2.65,56.3 24.85,56.3 28.55,56.3 32.25,56.3 35.95,56.3 39.65,56.3 43.35,56.3 50.75,56.3 54.45,56.3 61.85,56.3 65.55,56.3 69.25,56.3 95.15,56.3 98.85,56.3 0.8,60 11.9,60 19.3,60 23,60 30.4,60 34.1,60 37.8,60 41.5,60 48.9,60 52.6,60 60,60 63.7,60 67.4,60 74.8,60 78.5,60 82.2,60 85.9,60 13.75,63.7 17.45,63.7 21.15,63.7 24.85,63.7 32.25,63.7 35.95,63.7 39.65,63.7 43.35,63.7 47.05,63.7 50.75,63.7 61.85,63.7 65.55,63.7 69.25,63.7 72.95,63.7 76.65,63.7 80.35,63.7 84.05,63.7 87.75,63.7 30.4,67.4 71.1,67.4 74.8,67.4 78.5,67.4 82.2,67.4 85.9,67.4 93.3,67.4 6.35,71.1 10.05,71.1 13.75,71.1 17.45,71.1 21.15,71.1 24.85,71.1 28.55,71.1 32.25,71.1 35.95,71.1 39.65,71.1 65.55,71.1 69.25,71.1 76.65,71.1 80.35,71.1 84.05,71.1 87.75,71.1 11.9,74.8 15.6,74.8 19.3,74.8 23,74.8 26.7,74.8 30.4,74.8 34.1,74.8 37.8,74.8 48.9,74.8 82.2,74.8 85.9,74.8 89.6,74.8 93.3,74.8 10.05,78.5 13.75,78.5 47.05,78.5 50.75,78.5 54.45,78.5 58.15,78.5 61.85,78.5 65.55,78.5 69.25,78.5 72.95,78.5 80.35,78.5 11.9,82.2 19.3,82.2 23,82.2 26.7,82.2 30.4,82.2 34.1,82.2 37.8,82.2 41.5,82.2 45.2,82.2 48.9,82.2 52.6,82.2 56.3,82.2 60,82.2 63.7,82.2 67.4,82.2 71.1,82.2 74.8,82.2 82.2,82.2 13.75,85.9 17.45,85.9 21.15,85.9 24.85,85.9 28.55,85.9 32.25,85.9 35.95,85.9 39.65,85.9 43.35,85.9 47.05,85.9 50.75,85.9 54.45,85.9 58.15,85.9 61.85,85.9 65.55,85.9 69.25,85.9 72.95,85.9 76.65,85.9 80.35,85.9 87.75,85.9 98.85,85.9 0.8,89.6 4.5,89.6 19.3,89.6 23,89.6 26.7,89.6 30.4,89.6 34.1,89.6 37.8,89.6 41.5,89.6 45.2,89.6 48.9,89.6 52.6,89.6 56.3,89.6 60,89.6 63.7,89.6 67.4,89.6 71.1,89.6 74.8,89.6 78.5,89.6 82.2,89.6 93.3,89.6 97,89.6 2.65,93.3 6.35,93.3 17.45,93.3 21.15,93.3 24.85,93.3 28.55,93.3 32.25,93.3 35.95,93.3 39.65,93.3 43.35,93.3 47.05,93.3 50.75,93.3 54.45,93.3 58.15,93.3 61.85,93.3 65.55,93.3 69.25,93.3 72.95,93.3 76.65,93.3 80.35,93.3 84.05,93.3 87.75,93.3 91.45,93.3 95.15,93.3 98.85,93.3 0.8,97 4.5,97 8.2,97 11.9,97 15.6,97 19.3,97 26.7,97 30.4,97 34.1,97 37.8,97 41.5,97 45.2,97 48.9,97 52.6,97 56.3,97 60,97 63.7,97 67.4,97 71.1,97 74.8,97 78.5,97 82.2,97 85.9,97 89.6,97 93.3,97 97,97
NetC1_1: C1.1 IC1.1 R1.2 R4.1 | length 37
  Top Layer w0.6: R4.1 9.5,75.625 10.875,77 ; C1.1 R1.2 43.125,77 44.315,75.81 IC1.1
  Top Layer w0.8: 10.875,77 C1.1
NetC1_2: C1.2 IC1.2 R1.1 R8.1 | length 13.3
  Top Layer w0.6: C1.2 R1.1 43.125,75 43.585,74.54 IC1.2 46.54,74.54 47,75 47,77.149 45.149,79 R8.1
NetC2_1: C2.1 DA1.1 DA1.3 R10.2 R14.2 | length 14.2
  Top Layer w0.8: DA1.1 58.462,62.998 57.676,62.998 56.9,63.774 56.9,64.786 57.576,65.462 58.462,65.462 DA1.3
  Bottom Layer w0.8: R14.2 C2.1 58,62.868 58.092,62.96 DA1.1 ; DA1.3 58.946,65.5 59.038,65.592 59.038,67.163 59.875,68 R10.2
NetC3_1: C3.1 IC1.7 R9.2 R11.1 | length 35.9
  Top Layer w0.6: C3.1 R9.2 43.125,67 44.315,68.19 IC1.7
  Top Layer w0.8: R11.1 22.325,57 32.325,67 C3.1
NetC3_2: C3.2 IC1.6 R9.1 R17.1 | length 6.5
  Top Layer w0.6: R17.1 C3.2 R9.1 43.125,69 43.585,69.46 IC1.6
NetC8_1: C8.1 IC1.8 R18.2 R19.1 | length 42
  Top Layer w0.6: IC1.8 51.685,68.19 52.875,67 R18.2 C8.1
  Top Layer w0.8: C8.1 69.175,67 75.675,73.5 R19.1
NetC8_2: C8.2 IC1.9 R18.1 R23.1 | length 13.3
  Top Layer w0.6: R23.1 50,65 49.389,65.611 49.389,69.109 49.74,69.46 IC1.9 52.415,69.46 52.875,69 R18.1 C8.2
NetC10_1: C10.1 IC1.14 R24.2 R25.1 | length 40.1
  Top Layer w0.6: IC1.14 51.685,75.81 R24.2@52.875,77
  Top Layer w0.8: R24.2@52.875,77 R24.2 C10.1 74,77 85.175,88.175 85.3,88.175 85.5,88.375 R25.1
NetC10_2: C10.2 IC1.13 R24.1 R29.1 | length 6.5
  Top Layer w0.6: IC1.13 52.415,74.54 52.875,75 R24.1 C10.2 R29.1
NetD1_1: D1.1 D3.2 R12.2 TR1.4 | length 68.3
  Top Layer w2.5: TR1.4 84.8,26 R12.2
  Bottom Layer w1.5: TR1.4 57.269,26.019 57.269,27.769 59,29.5 65.121,29.5 66,28.621 66,22.225 62.65,18.875 D3.2 ; D1.1 D3.2 ; D3.2@63.098,18.948 D3.2
NetD2_1: D2.1 D4.2 R12.1 TR1.5 | length 69.5
  Top Layer w2.5: TR1.5 67.971,16 80.671,3.3 R12.1
  Bottom Layer w1.5: TR1.5 59.5,16 ; D2.1 60.379,3.5 59.5,4.379 59.5,16 ; D4.2 60.379,26 59.5,25.121 59.5,16
NetF1_1: F1.1 TR1.2 | length 36.1
  Top Layer w2.5: TR1.2 39.325,18.575 F1.1
NetF1_2: F1.2 P1.1 | length 12.4
  Top Layer w2.5: P1.1 27.675,40.165 F1.2
NetIC1_3: IC1.3 R5.2 | length 2
  Top Layer w0.6: R5.2 43.5,73.07 43.7,73.27 IC1.3
NetIC1_5: IC1.5 R13.2 | length 2
  Top Layer w0.6: R13.2 43.5,70.93 43.7,70.73 IC1.5
NetIC1_10: IC1.10 R20.2 | length 2.5
  Top Layer w0.6: IC1.10 52.8,70.73 53,70.93 R20.2
NetIC1_12: IC1.12 R26.2 | length 2.5
  Top Layer w0.6: IC1.12 52.8,73.27 53,73.07 R26.2
NetP1_2: P1.2 TR1.1 | length 19.3
  Top Layer w2.5: P1.2 31.75,25.96 TR1.1
NetP2_2: P2.2 R10.1 | length 2
  Bottom Layer w0.6: R10.1 60.02,70.02 60.02,71.98 P2.2
NetP2_3: P2.3 R5.1 R13.1 R20.1 R26.1 | length 20
  Top Layer w0.6: R13.1 v1(41.5,72) R5.1 ; R20.1 v1(55,72) R26.1@55,72.999
  Bottom Layer w0.6: v1(41.5,72) v1(55,72) ; v1(55,72) P2.3
NetR4_2: R4.2 R6.2 VT2.1 | length 6.3
  Top Layer w0.8: R6.2 7.5,75.5 7.6,75.6 7.6,79.15 VT2.1
NetR7_2: R7.2 R8.2 VT2.3 | length 43
  Top Layer w0.8: R7.2 15,81.5 17.5,79 R8.2
  Top Layer w5: VT2.3 R7.2@14.75,90.45
NetR11_2: R11.2 R15.2 VT1.1 | length 6.2
  Top Layer w0.8: VT1.1 8.225,56.775 11.8,56.775 R11.2@12,56.975 ; R15.2 R11.2@12,56.975 ; R11.2 R11.2@12,56.975
NetR16_2: R16.2 R17.2 VT1.3 | length 29.6
  Top Layer w0.6: R16.2 26.2,69
  Top Layer w0.8: 26.2,69 R17.2
  Top Layer w5: VT1.3 R16.2@24.35,67.45
NetR19_2: R19.2 R21.2 VT3.1 | length 6.3
  Top Layer w0.8: VT3.1 91.4,67.85 91.4,71.4 R21.2 ; R21.2 R19.2
NetR22_2: R22.2 R23.2 VT3.3 | length 40.6
  Top Layer w0.8: R23.2 55,62.5 56,61.5 69.8,61.5 R22.2
  Top Layer w5: R22.2 VT3.3@90.75,56.8
NetR25_2: R25.2 R27.2 VT4.1 | length 5.5
  Top Layer w0.8: R25.2 R27.2 87.525,90.475 90.975,90.475 VT4.1
NetR28_2: R28.2 R29.2 VT4.3 | length 33.8
  Top Layer w0.8: R29.2 79.5,75 R28.2
  Top Layer w5: R28.2@84.05,79.55 VT4.3
NetVT1_2: VT1.2 VT2.2 X1.1 | length 30.8
  Top Layer w4.5: VT1.2 5.211,62 2.575,64.636 2.575,82.364 5.211,85 VT2.2
NetVT3_2: VT3.2 VT4.2 X3.1 | length 32.3
  Top Layer w4.5: VT3.2 95,62 97,64 97,70.96 97,76.04 97,82.364 94.364,85 VT4.2
pads on no net: P1.3 TR1.3 TR1.6 VT1. VT2. VT3. VT4.
copper on no net: | length 0

## Polygon pours and split planes (outlines as drawn)
GND on Bottom Layer "Top Layer-No Net" (solid, remove dead copper, pour order 0): 0,0 0,100 99.5,100 100,100.5 100,0
GND on Top Layer "Bottom Layer-No Net" (solid, remove dead copper, pour order 2): 0,0 0,100 99.5,100 100,100.5 100,0

## Keep-outs
Keep-Out Layer:
  the board outline again, w0.35

## Other copper
Top Layer:
  pour cut-out: 16.5,34
  pour cut-out: 18,40 25,47 43.5,47 43.5,2.5 39.688,2.485
  pour cut-out: 18.5,41
  pour cut-out: 5,40 39.5,40 40,39.5 40,2.5 25,2.5 17.5,10 5,10
Bottom Layer:
  pour cut-out: 17.5,39.5 25,47 43.385,47 43.5,46.885 43.5,2.5 25,2.5 17.5,10
  pour cut-out: 50.5,24.5
  pour cut-out: 5,40 5,10 17.5,10 25,2.5 40,2.5 40,40
  pour cut-out: 15,40
  pour cut-out: 15,37.5
  pour cut-out: 0,40

## Silkscreen, mask and mechanical layers (free items; w line width, h text height)
Top Overlay:
  text "TWOLFE239" at 29.009,87.241 h10
Border:
  lines w0.35: 0,0 100,0 100,50 100,100 0,100 0,50 0,0

## Text inside footprints (layer, text, board x,y; h text height)
P1: Top Overlay "N" at 24.3,16.36 h1.5 r270; Top Overlay "E" at 24.3,25.5 h1.5 r270; Top Overlay "L" at 24.3,34.64 h1.5 r270; Top Assy "PCB Edge" at 3.683,49.4 h0.5 r270
TR1: Mechanical 14 "SEC" at 53.35,11.964 h1.2 r90; Mechanical 14 "SEC" at 53.35,26.964 h1.2 r90; Mechanical 14 "PRIM" at 36.936,19.254 h1.2 r90